# EAGLE board Battery (EAGLE 6.6.0)
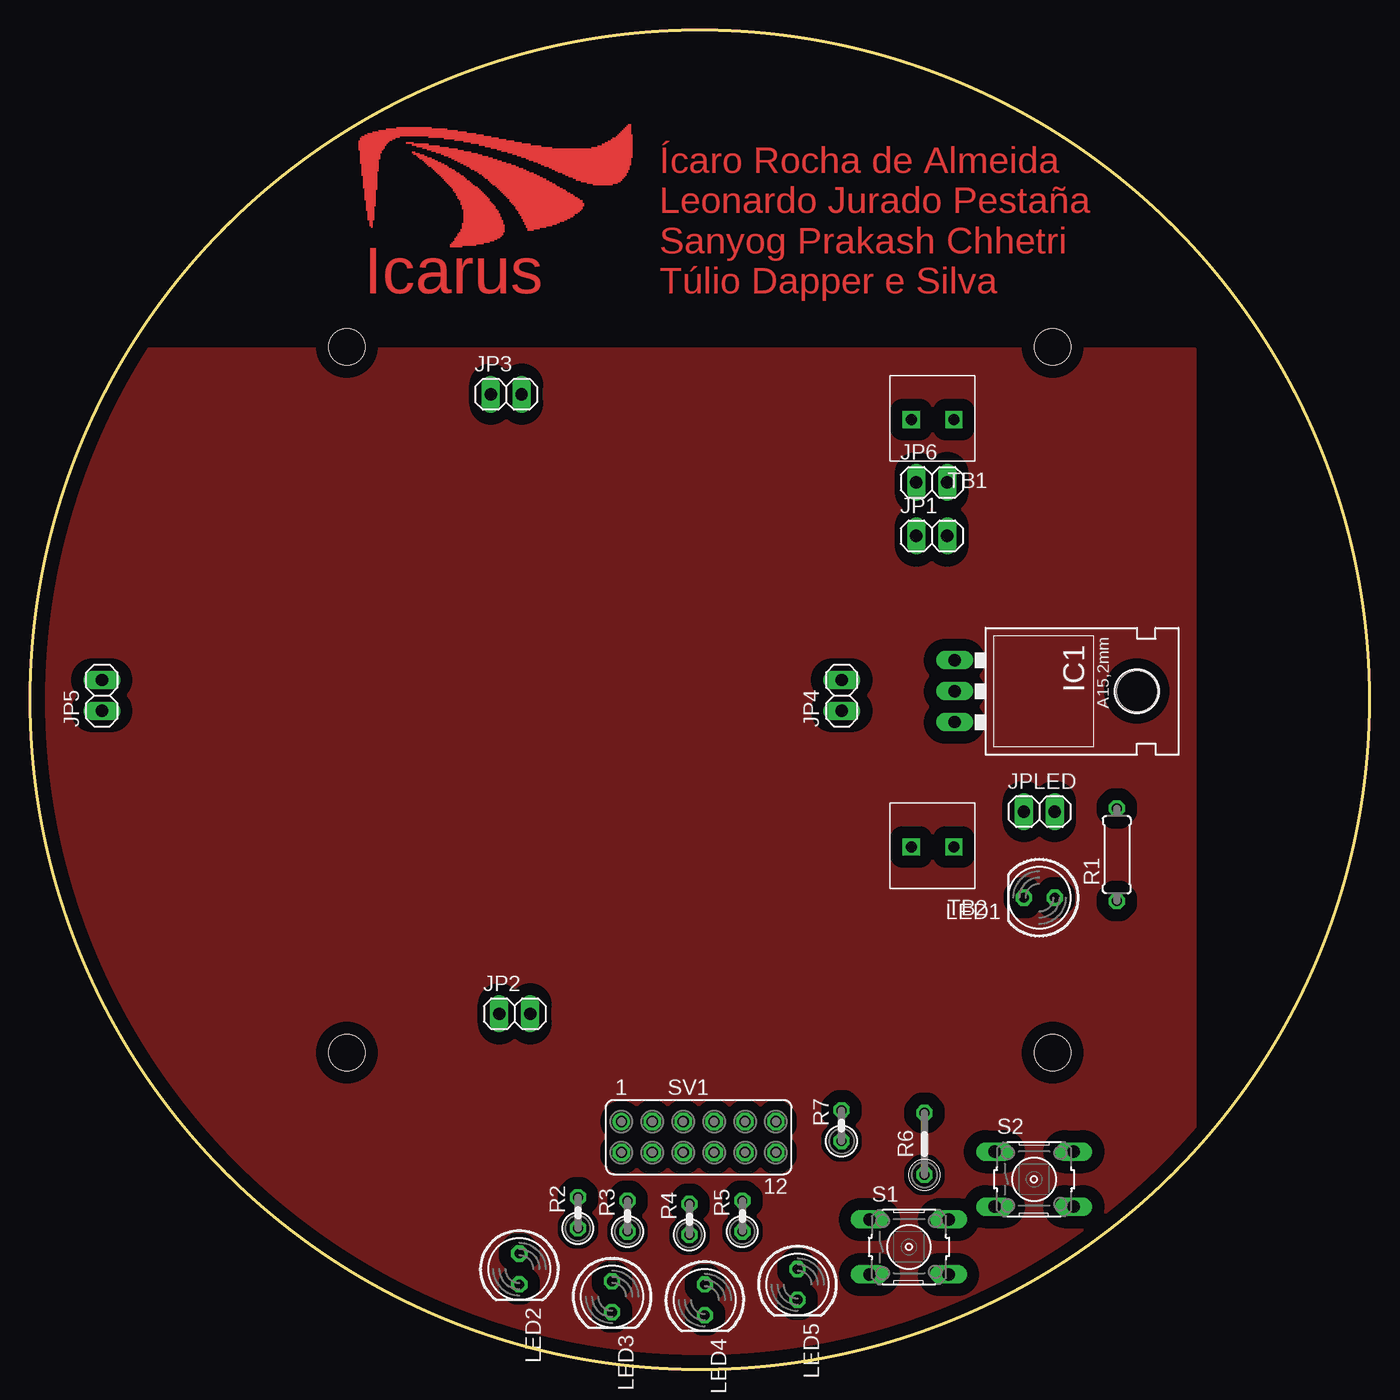
[diagram p0: board, top side]
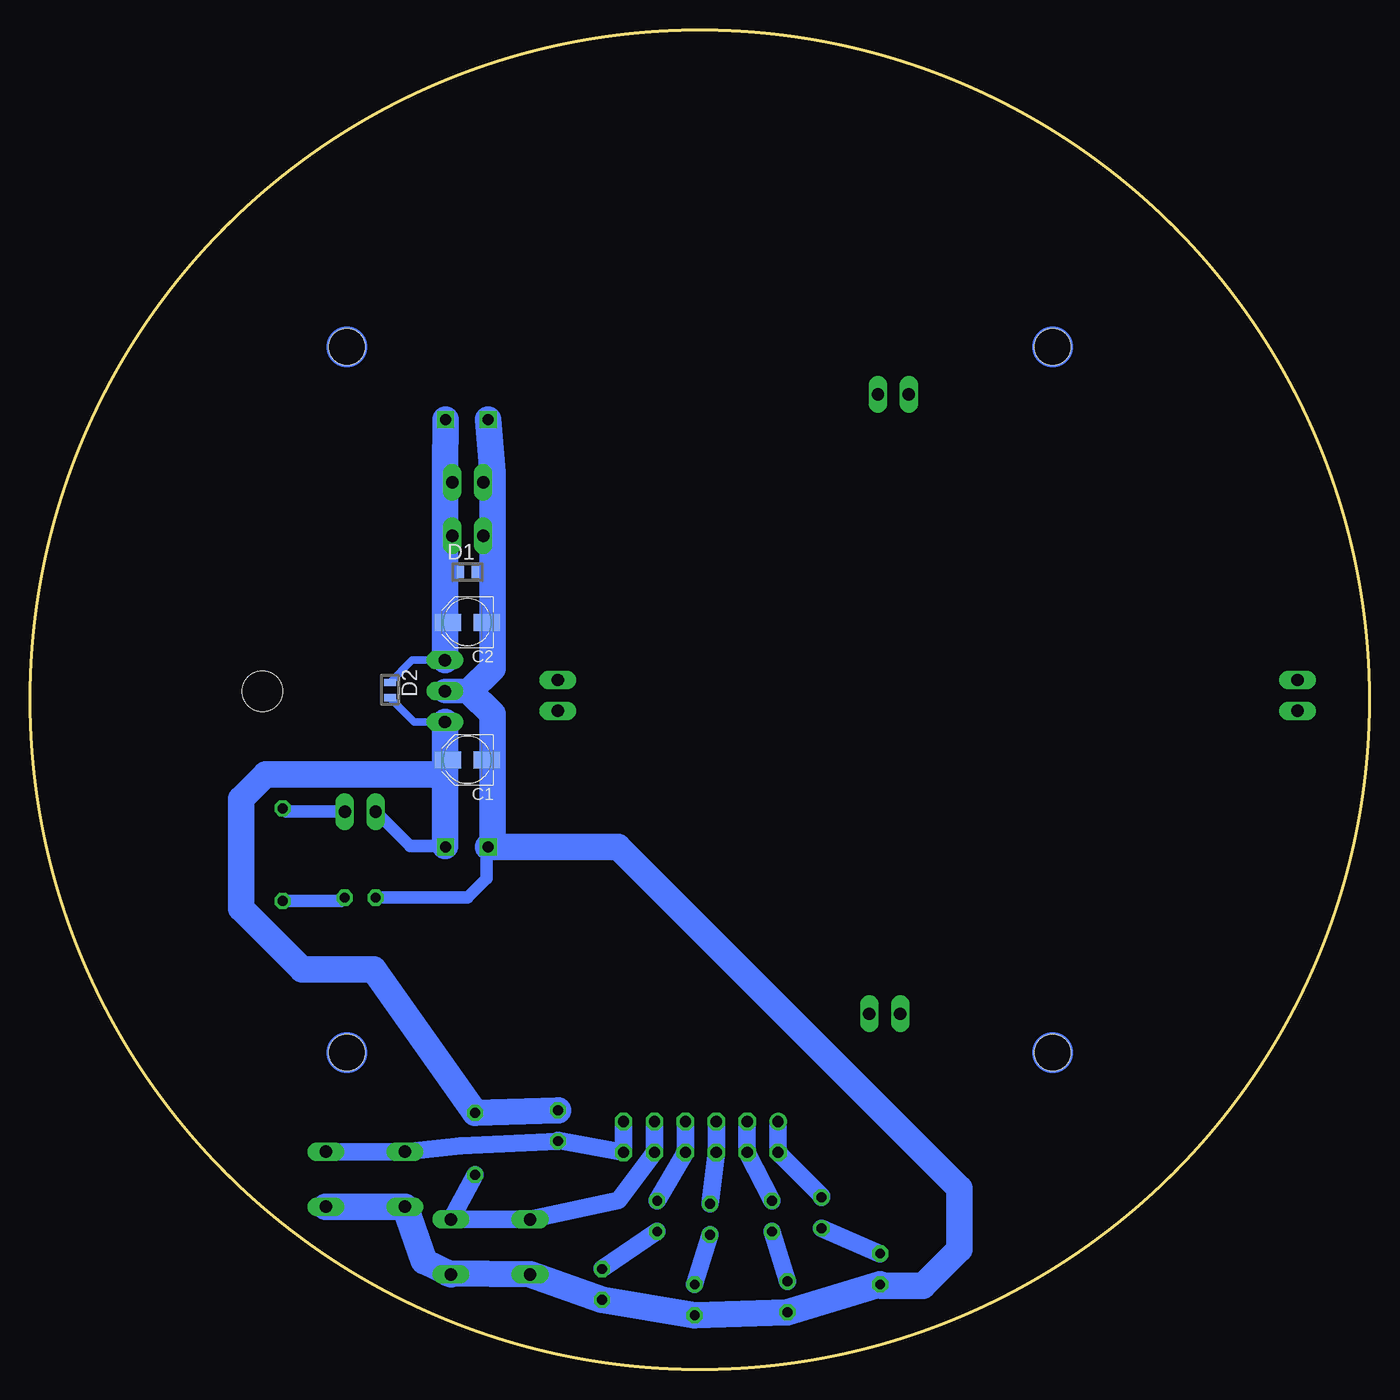
[diagram p1: board, bottom side, seen from below]

Size 110 x 110 mm. Coordinates in mm from the lower left corner, seen from the top.
Outline: circle at 55,55 radius 55
Copper layers (1*16): Top 0.035mm / dielectric 1.5mm / Bottom 0.035mm
Design rules "default": minimum track width 10mil, minimum drill 24mil, track to track 8mil, track to pad 8mil, pad to pad 8mil, via to via 8mil, smd to smd 8mil, copper to edge 40mil, drill to drill 8mil, minimum pad ring 10mil, minimum via ring 8mil, stop-mask expansion 4mil, vias tented up to drill 0mil, thermal gap 10mil
Holes 3 mm at 26.01,83.99 83.99,83.99 83.99,26.01 26.01,26.01

## Footprints (pad centres in the part's own frame; a part is rotated, then mirrored left to right if it is on the bottom)
PANASONIC_B = smd 2.2 x 1.4: + 1.6,0; - -1.6,0
SOD123 = smd 0.6 x 1: A 1.25,0; C 0,0
78XXL = drill 1.016 long: GND 0,-3.81; IN -2.54,-3.81; OUT 2.54,-3.81 | hole 3.302: 0,11.176
1X02 = drill 1.016 long: 1 -1.27,0; 2 1.27,0
LED5MM = drill 0.813 octagon: A -1.27,0; K 1.27,0
0207/7 = drill 0.813 octagon: 1 -3.81,0; 2 3.81,0
0207/2V = drill 0.813 octagon: 1 -1.27,0; 2 1.27,0
0207/5V = drill 0.813 octagon: 1 -2.54,0; 2 2.54,0
B3F-10XX = drill 1.016 long: 1 -3.251,2.261; 2 3.251,2.261; 3 -3.251,-2.261; 4 3.251,-2.261
FE06-2 = drill 0.914: 1 -6.35,1.27 | drill 0.914 octagon: 2 -6.35,-1.27; 3 -3.81,1.27; 4 -3.81,-1.27; 5 -1.27,1.27; 6 -1.27,-1.27; 7 1.27,1.27; 8 1.27,-1.27; 9 3.81,1.27; 10 3.81,-1.27; 11 6.35,1.27; 12 6.35,-1.27
TERMINAL_BLOCK_2W = drill 0.9 square: P$1 1.75,3.6; P$2 5.25,3.6

## Placement (x,y rotation side)
C1  22uF  [PANASONIC_B]  74.09,50.05 180 bottom
C2  3.3uF  [PANASONIC_B]  74.09,61.36 180 bottom
D1  [SOD123]  74.68,65.49 0 bottom
D2  [SOD123]  80.46,56.41 270 bottom
IC1  [78XXL]  79.75,55.71 270 top
JP1  [1X02]  74.06,68.46 0 top
JP2  [1X02]  39.8,29.19 0 top
JP3  [1X02]  39.09,80.1 0 top
JP4  [1X02]  66.66,55.35 90 top
JP5  [1X02]  5.86,55.35 90 top
JP6  [1X02]  74.06,72.86 0 top
JPLED  [1X02]  82.91,45.81 0 top
LED1  [LED5MM]  82.91,38.74 180 top
LED2  [LED5MM]  40.17,8.22 270 top
LED3  [LED5MM]  47.79,5.95 270 top
LED4  [LED5MM]  55.41,5.68 270 top
LED5  [LED5MM]  63.03,6.95 270 top
R1  [0207/7]  89.27,42.27 90 top
R2  [0207/2V]  44.98,12.84 90 top
R3  [0207/2V]  49.06,12.57 90 top
R4  [0207/2V]  54.14,12.3 90 top
R5  [0207/2V]  58.49,12.57 90 top
R6  [0207/5V]  73.46,18.5 90 top
R7  [0207/2V]  66.65,20 90 top
S1  [B3F-10XX]  72.19,10.03 0 top
S2  [B3F-10XX]  82.47,15.6 0 top
SV1  [FE06-2]  54.91,19.07 0 top
TB1  TERMINAL-BLOCK-2W  [TERMINAL_BLOCK_2W]  77.63,81.63 180 top
TB2  TERMINAL-BLOCK-2W  [TERMINAL_BLOCK_2W]  77.63,46.51 180 top

## Library data of the parts
C1 C2 = adafruit
D1 D2 TB1 TB2 = GFL_Micromouse
IC1 = v-reg
JP1-JP6 JPLED = pinhead
LED1-LED5 = led
R1-R7 = resistor
S1 S2 = switch-omron; MPN: B3F-1000; OC_FARNELL: 176432; OC_NEWARK: 36M3542
SV1 = con-lsta; OC_FARNELL: unknown; OC_NEWARK: unknown

## Nets
GND: C1.- C2.- D1.A IC1.GND JP1.1 JP6.1 LED1.K LED2.K LED3.K LED4.K LED5.K S1.3 S1.4 S2.3 S2.4 TB1.P$2 TB2.P$2
N$1: R2.2 SV1.1 SV1.2
N$3: JPLED.2 R1.2
N$4: LED1.A R1.1
N$5: LED2.A R2.1
N$6: R3.2 SV1.3 SV1.4
N$7: R4.2 SV1.5 SV1.6
N$8: R5.2 SV1.7 SV1.8
N$9: R6.1 S1.1 S1.2 SV1.9 SV1.10
N$11: R7.1 S2.1 S2.2 SV1.11 SV1.12
N$12: LED3.A R3.1
N$13: LED4.A R4.1
N$14: LED5.A R5.1
N$16: C1.+ D2.A IC1.OUT JPLED.1 R6.2 R7.2 TB2.P$1
VDD: C2.+ D1.C D2.C IC1.IN JP1.2 JP6.2 TB1.P$1

## Tracks (layer width: path | path; a pad name or v marks a point on that pad's centre or on a via)
GND
  Bottom 0.254: JP6.1 72.03,72.86
  Bottom 0.61: D1.A 72.28,65.25 72.03,64.57 | C1.- 72.08,50.05 72.03,50.1
  Bottom 1.016: LED1.K 74.06,38.74 72.5,40.3 72.5,42.79 TB2.P$2
  Bottom 1.422: C2.- 72.1,61.36 72.03,61.3 | JP1.1 72.11,68.46 72.03,68.53 | 75.66,7.86 S1.4 | LED2.K 40.08,6.86
  Bottom 2: IC1.GND 73.89,55.71 73.89,55.69 | 72.03,43.26 TB2.P$2
  Bottom 2.184: 73.89,55.71 72.03,57.57 72.03,61.3 72.03,64.57 72.03,68.53 72.03,72.86 72.03,73.68 TB1.P$2 | 73.89,55.69 72.03,53.83 72.03,50.1 72.03,43.26 | LED2.K LED3.K LED4.K LED5.K S1.3 75.66,7.86 | S1.4 77.66,8.86 S2.3 S2.4 | 40.08,6.86 36.66,6.86 33.66,9.86 33.66,14.86 61.72,42.92 TB2.P$2
N$1
  Bottom 1.422: R2.2 44.98,14.22 SV1.2 SV1.1
N$2
  pour Top (isolate 1): 8.66,83.86 95.66,83.86 95.66,17.86 89.66,12.86 81.66,6.86 72.66,2.86 64.66,0.86 55.66,-0.14 39.66,1.86 31.66,4.86 23.66,9.86 15.66,16.86 8.66,24.86 4.66,33.86 1.66,42.86 -0.34,51.86 0.66,63.86 3.66,75.86
N$3
  Bottom 1.016: JPLED.2 88.99,45.81 R1.2
N$4
  Bottom 1.016: R1.1 84.45,38.46 LED1.A
N$5
  Bottom 1.422: R2.1 LED2.A
N$6
  Bottom 1.422: R3.2 SV1.4 SV1.3
N$7
  Bottom 1.422: R4.2 SV1.6 SV1.5
N$8
  Bottom 1.422: R5.2 SV1.8 SV1.7
N$9
  Bottom 1.422: R6.1 S1.2 S1.1 61.66,13.86 SV1.10 SV1.9
N$11
  Bottom 1.422: SV1.11 SV1.12 66.65,18.8 R7.1 74.66,18.36 S2.1 S2.2
N$12
  Bottom 1.422: R3.1 LED3.A
N$13
  Bottom 1.422: R4.1 LED4.A
N$14
  Bottom 1.422: R5.1 LED5.A
N$16
  Bottom 0.61: IC1.OUT 78.46,53.17 D2.A | C1.+ 75.89,50.05 75.94,50.1
  Bottom 1.016: 75.94,42.98 78.8,42.98 JPLED.1
  Bottom 2: 75.94,42.98 TB2.P$1
  Bottom 2.184: R7.2 R6.2 81.78,32.86 87.66,32.86 92.66,37.86 92.66,46.86 90.66,48.86 75.94,48.86 | IC1.OUT 75.94,50.1 75.94,48.86 | 75.94,48.86 75.94,42.98
VDD
  Bottom 0.254: JP6.2 75.94,72.86
  Bottom 0.61: D1.C 75.92,64.55 75.94,64.57 | IC1.IN 78.62,58.25 D2.C
  Bottom 1.422: C2.+ 75.87,61.36 75.94,61.3 | JP1.2 75.86,68.46 75.94,68.53
  Bottom 2.184: IC1.IN 75.94,61.3 75.94,64.57 75.94,68.53 75.94,72.86 75.94,73.97 TB1.P$1
(copper drawn outside any net)
  shapes: Bottom circle x4, Top area x235

## Text on the board
Top: Icarus | Ícaro Rocha de Almeida / Leonardo Jurado Pestaña / Sanyog Prakash Chhetri / Túlio Dapper e Silva